# EAGLE board 1st-project (EAGLE 9.6.2)
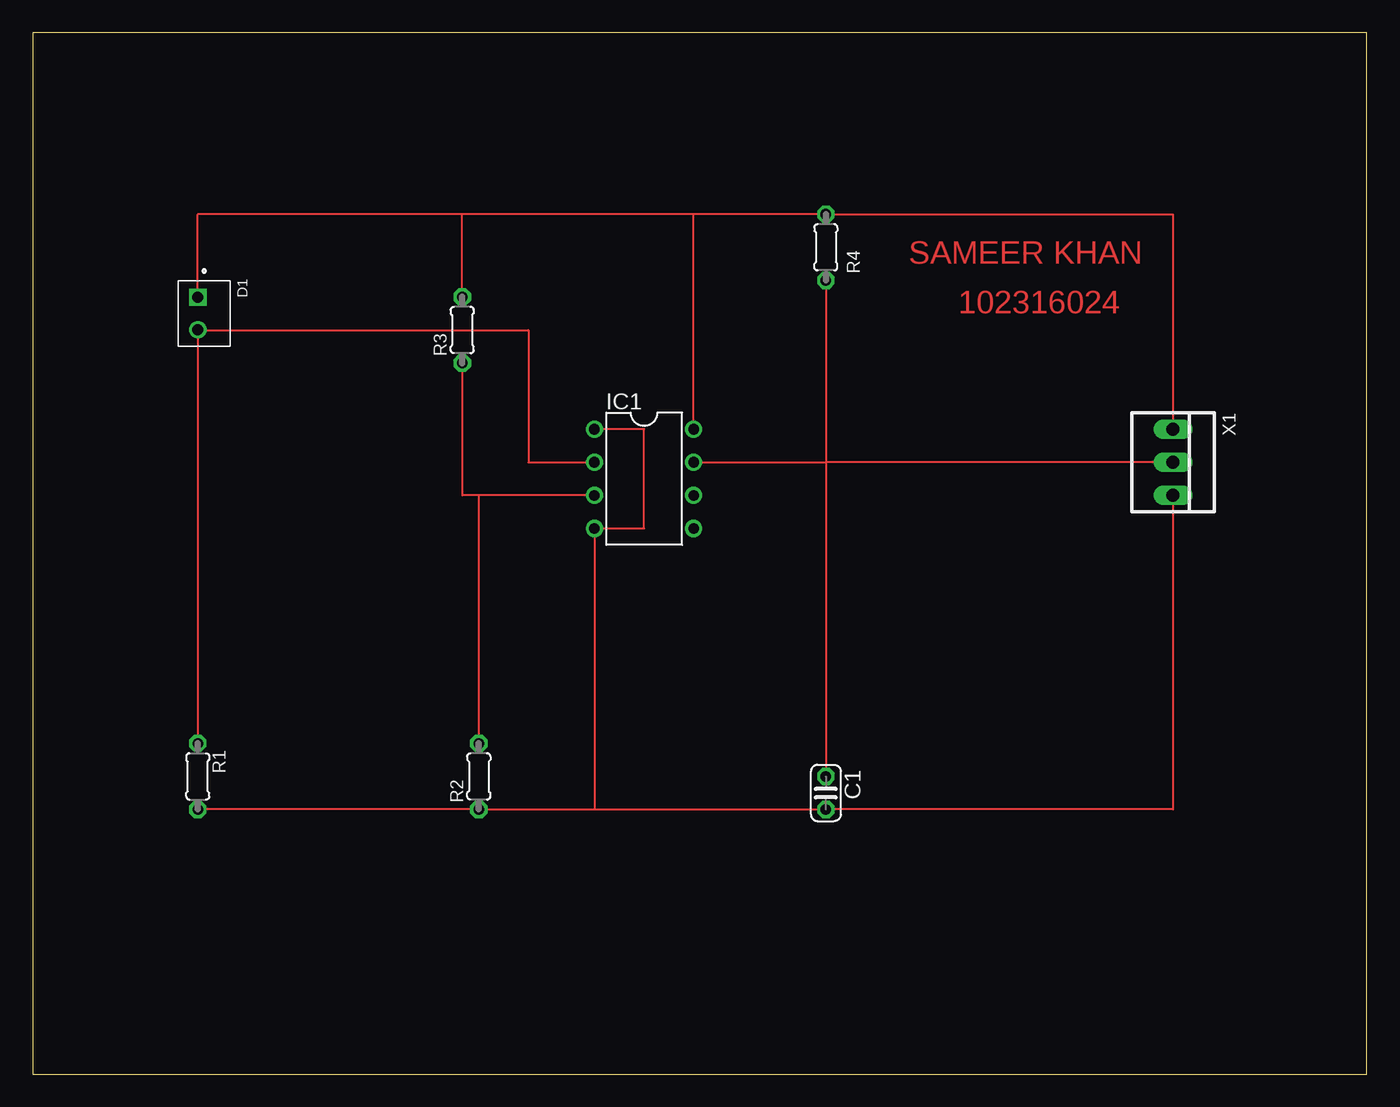
[diagram p0: board, top side]

Size 102.54 x 80 mm. Coordinates in mm from the lower left corner, seen from the top.
Outline: 0,0 102.54,0 102.54,80 0,80 0,0
Copper layers (1*16): Top 0.035mm / dielectric 1.5mm / Bottom 0.035mm
Design rules "default": minimum track width 6mil, minimum drill 0.35mm, track to track 6mil, track to pad 6mil, pad to pad 6mil, via to via 6mil, smd to smd 6mil, copper to edge 40mil, drill to drill 6mil, minimum pad ring 10mil, minimum via ring 8mil, stop-mask expansion 4mil, vias tented up to drill 0mil, thermal gap 10mil

## Footprints (pad centres in the part's own frame; a part is rotated, then mirrored left to right if it is on the bottom)
C025-024X044 = drill 0.813 octagon: 1 -1.27,0; 2 1.27,0
DIO_BPW41N = drill 0.83 pad 1.25: A 1.25,0 | drill 0.83 pad 1.25 square: C -1.25,0
DIL08 = drill 0.813 pad 1.27: 1 -3.81,-3.81; 2 -1.27,-3.81; 3 1.27,-3.81; 4 3.81,-3.81; 5 3.81,3.81; 6 1.27,3.81; 7 -1.27,3.81; 8 -3.81,3.81
0204/5 = drill 0.813 octagon: 1 -2.54,0; 2 2.54,0
22-23-2031 = drill 1 long: 1 -2.54,0; 2 0,0; 3 2.54,0

## Placement (x,y rotation side)
C1  10pf  [C025-024X044]  60.96,21.59 270 top
D1  BPW41N  [DIO_BPW41N]  12.7,58.42 270 top
IC1  LM311N  [DIL08]  46.99,45.72 270 top
R1  120K  [0204/5]  12.7,22.86 270 top
R2  22K  [0204/5]  34.29,22.86 90 top
R3  [0204/5]  33.02,57.15 90 top
R4  1K  [0204/5]  60.96,63.5 90 top
X1  22-23-2031  [22-23-2031]  87.63,46.99 270 top

## Library data of the parts
C1 = rcl; SPICEPREFIX: C
D1 = BPW41N; AVAILABILITY: In Stock; DESCRIPTION: Photodiode 940nm 130° Radial, Side View; MF: Vishay Semiconductor Opto Division; MP: BPW41N; PACKAGE: None; PRICE: None; PURCHASE-URL: https://pricing.snapeda.com/search/part/BPW41N/?ref=eda
IC1 = linear
R1-R4 = rcl; SPICEPREFIX: R
X1 = con-molex; MF: MOLEX; MPN: 22-23-2031; OC_FARNELL: 1462950; OC_NEWARK: 30C0862

## Nets
N$1: D1.A IC1.2 R1.1
N$2: D1.C IC1.8 R3.2 R4.2 X1.1
N$3: C1.2 IC1.1 IC1.4 R1.2 R2.1 X1.3
N$5: IC1.3 R2.2 R3.1
N$6: C1.1 IC1.7 R4.1 X1.2

## Tracks (layer width: path | path; a pad name or v marks a point on that pad's centre or on a via)
N$1
  Top 0.152: R1.1 D1.A 12.72,57.15 38.1,57.15 38.1,46.99 IC1.2
N$2
  Top 0.152: 12.7,59.69 D1.C 12.7,66.04 33.02,66.04 | R3.2 33.02,66.04 | X1.1 87.63,66.04 R4.2 50.8,66.04 | 50.8,66.04 33.02,66.04 | IC1.8 50.8,66.04
N$3
  Top 0.152: R1.2 R2.1 43.18,20.32 | 43.18,20.32 C1.2 87.63,20.32 X1.3 | 43.18,20.32 IC1.4 46.99,41.91 46.99,49.53 IC1.1
N$5
  Top 0.152: R3.1 33.02,44.45 34.29,44.45 | 34.29,44.45 R2.2 | IC1.3 34.29,44.45
N$6
  Top 0.152: X1.2 60.96,46.99 | 60.96,46.99 C1.1 | IC1.7 60.96,46.99 | R4.1 60.96,46.99

## Text on the board
Top: SAMEER KHAN | 102316024